# EAGLE board Stunning Densor-Lahdi (EAGLE 9.7.0)

Size 215.31 x 129.83 mm. Coordinates in mm from the lower left corner, seen from the top.
Outline: 0,0 215.31,0 215.31,129.83 0,129.83 0,0
Copper layers (1*16): Top 0.035mm / dielectric 1.5mm / Bottom 0.035mm
Design rules "default": minimum track width 6mil, minimum drill 0.35mm, track to track 6mil, track to pad 6mil, pad to pad 6mil, via to via 6mil, smd to smd 6mil, copper to edge 40mil, drill to drill 6mil, minimum pad ring 10mil, minimum via ring 8mil, stop-mask expansion 4mil, vias tented up to drill 0mil, thermal gap 10mil

## Footprints (pad centres in the part's own frame; a part is rotated, then mirrored left to right if it is on the bottom)
BATTERY-GENERIC = drill 1.118 pad 3.15 octagon: + 2.54,0; - -2.54,0
MOTOR = drill 1.118 pad 3.15 octagon: + 2.54,0; - -2.54,0
DG01D = drill 1.118 pad 3.15 octagon: + 2.54,0; - -2.54,0
SWITCH-MOMENTARY-PTH-6.5MM = drill 1.016 pad 1.88: 1 -3.251,2.261; 2 3.251,2.261; 3 -3.251,-2.261; 4 3.251,-2.261
ARDUINO-UNO-R3-SHIELD = drill 1.016 pad 1.88: 3.3V 24.13,-2.54; 5V 24.13,0; A0 24.13,12.7; A1 24.13,15.24; A2 24.13,17.78; A3 24.13,20.32; A4 24.13,22.86; A5 24.13,25.4; AREF -24.13,-13.97; D2 -24.13,20.32; D3 -24.13,17.78; D4 -24.13,15.24; D5 -24.13,12.7; D6 -24.13,10.16; D7 -24.13,7.62; D8 -24.13,3.81; D9 -24.13,1.27; D10 -24.13,-1.27; D11 -24.13,-3.81; D12 -24.13,-6.35; D13 -24.13,-8.89; GND@0 24.13,2.54; GND@1 24.13,5.08; GND@2 -24.13,-11.43; IOREF 24.13,-7.62; NC 24.13,-10.16; RES 24.13,-5.08; RX -24.13,25.4; SCL -24.13,-19.05; SDA -24.13,-16.51; TX -24.13,22.86; VIN 24.13,7.62
DIP762W53P254L1969H508Q16B = drill 0.743 pad 1.343: 1 -3.81,8.89; 2 -3.81,6.35; 3 -3.81,3.81; 4 -3.81,1.27; 5 -3.81,-1.27; 6 -3.81,-3.81; 7 -3.81,-6.35; 8 -3.81,-8.89; 9 3.81,-8.89; 10 3.81,-6.35; 11 3.81,-3.81; 12 3.81,-1.27; 13 3.81,1.27; 14 3.81,3.81; 15 3.81,6.35; 16 3.81,8.89

## Placement (x,y rotation side)
BAT1  6V  [BATTERY-GENERIC]  207.06,121.58 0 top
M1  MOTOR_HDR  [MOTOR]  146.56,59.58 270 top
MSELF_LACING_MOTOR  MOTOR_DG01D  [DG01D]  71.61,12.7 90 top
S1  SWITCH_MOMENTARY  [SWITCH-MOMENTARY-PTH-6.5MM]  101.63,49.55 0 top
S2  SWITCH_MOMENTARY  [SWITCH-MOMENTARY-PTH-6.5MM]  101.63,41.93 0 top
SLOOSEN  SWITCH_MOMENTARY  [SWITCH-MOMENTARY-PTH-6.5MM]  101.63,62.25 0 top
STIGHTEN  SWITCH_MOMENTARY  [SWITCH-MOMENTARY-PTH-6.5MM]  101.63,72.41 0 top
U1  ARDUINO-UNO-R3-SHIELD  [ARDUINO-UNO-R3-SHIELD]  29.84,75.56 180 top
U2  L293E  [DIP762W53P254L1969H508Q16B]  101.63,94 0 top

## Library data of the parts
BAT1 M1 MSELF_LACING_MOTOR S1 S2 SLOOSEN STIGHTEN U1 U2 = Tinkercad

## Nets
BAT1+: BAT1.+ U2.8
BAT1-: BAT1.- S1.3 S1.4 S2.3 S2.4 SLOOSEN.3 SLOOSEN.4 STIGHTEN.3 STIGHTEN.4 U1.GND@0 U1.GND@1 U1.GND@2 U2.4 U2.5 U2.12 U2.13
M1_+: M1.+ U2.14
M1_-: M1.- U2.11
MSELF_LACING_MOTOR_+: MSELF_LACING_MOTOR.+ U2.3
MSELF_LACING_MOTOR_-: MSELF_LACING_MOTOR.- U2.6
U1_5V: U1.5V U2.1 U2.16
U1_D2: SLOOSEN.1 SLOOSEN.2 U1.D2
U1_D3: STIGHTEN.1 STIGHTEN.2 U1.D3
U1_D4: S1.1 S1.2 U1.D4
U1_D5: S2.1 S2.2 U1.D5
U1_D7: U1.D7 U2.9
U1_D8: U1.D8 U2.7
U1_D12: U1.D12 U2.2
U1_D13: U1.D13 U2.15

## Tracks (layer width: path | path; a pad name or v marks a point on that pad's centre or on a via)
BAT1+  (1 unrouted)
BAT1-  (15 unrouted)
M1_+  (1 unrouted)
M1_-  (1 unrouted)
MSELF_LACING_MOTOR_+  (1 unrouted)
MSELF_LACING_MOTOR_-  (1 unrouted)
U1_5V  (2 unrouted)
U1_D2  (2 unrouted)
U1_D3  (2 unrouted)
U1_D4  (2 unrouted)
U1_D5  (2 unrouted)
U1_D7  (1 unrouted)
U1_D8  (1 unrouted)
U1_D12  (1 unrouted)
U1_D13  (1 unrouted)